# Altium PCB USB-C Charger.PcbDoc
Units mil, origin at the board's own origin, x right, y up, seen from the top; angles counter-clockwise.
Board outline 2460 x 795 mil, 2 copper layers (Top Layer, Bottom Layer); 29 components, 18 nets, 133 pads, 16 vias.
Unrouted connection lines stored in the file: 1.
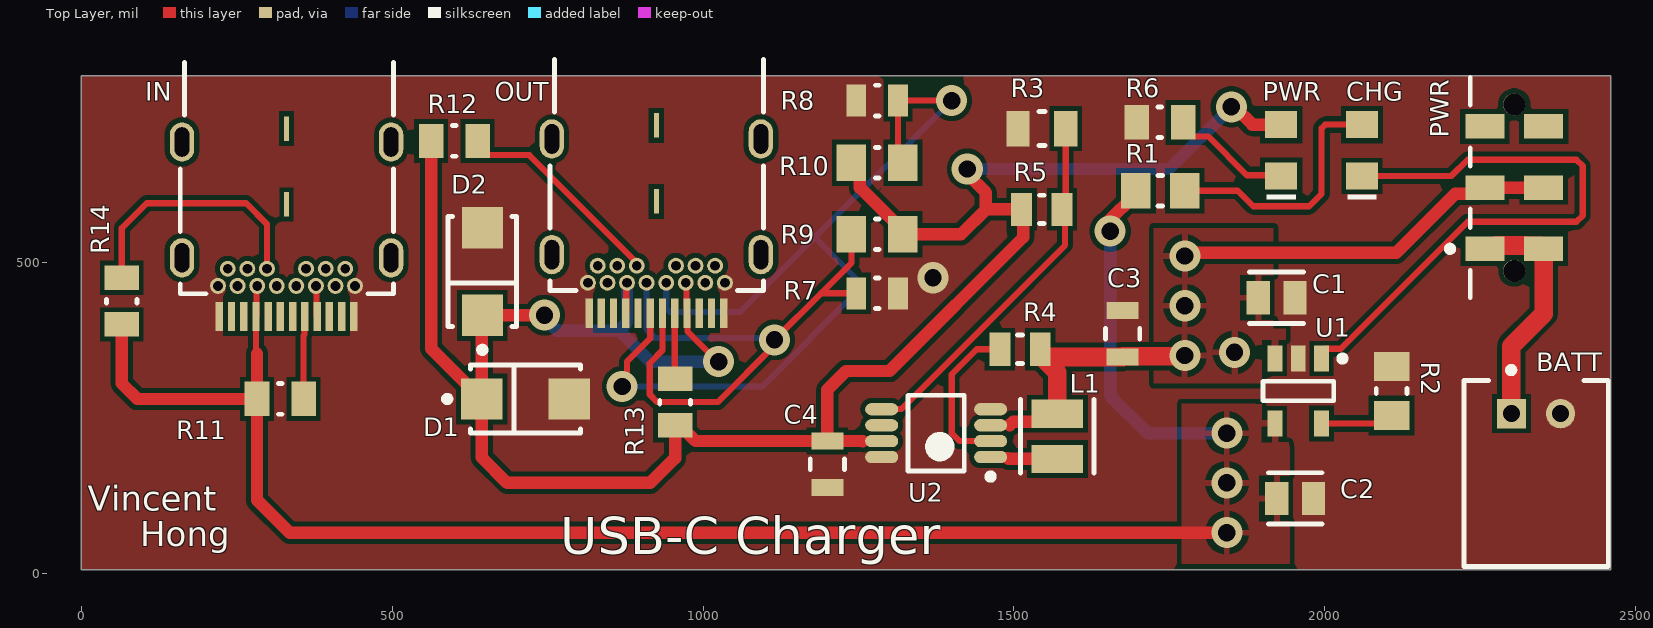
[diagram p0: Top Layer view]
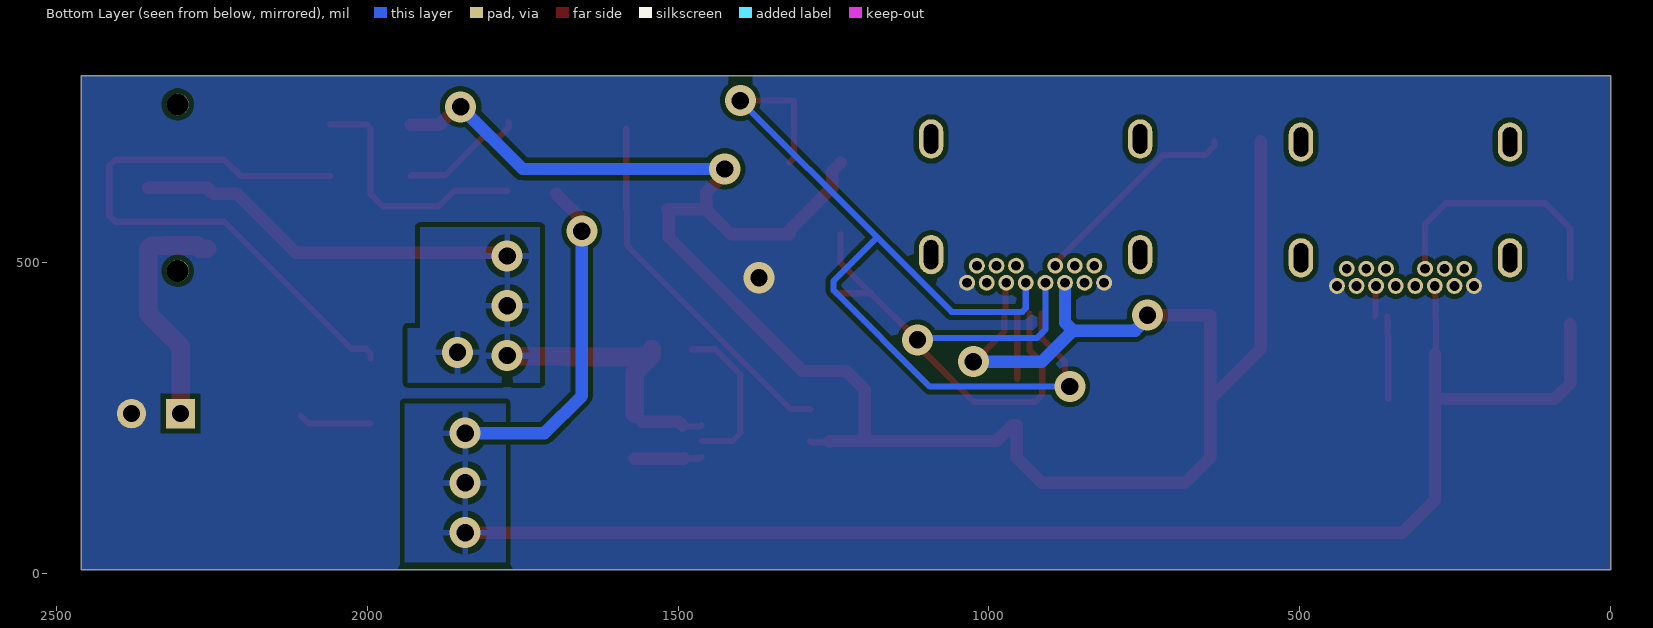
[diagram p1: Bottom Layer view, seen from below]
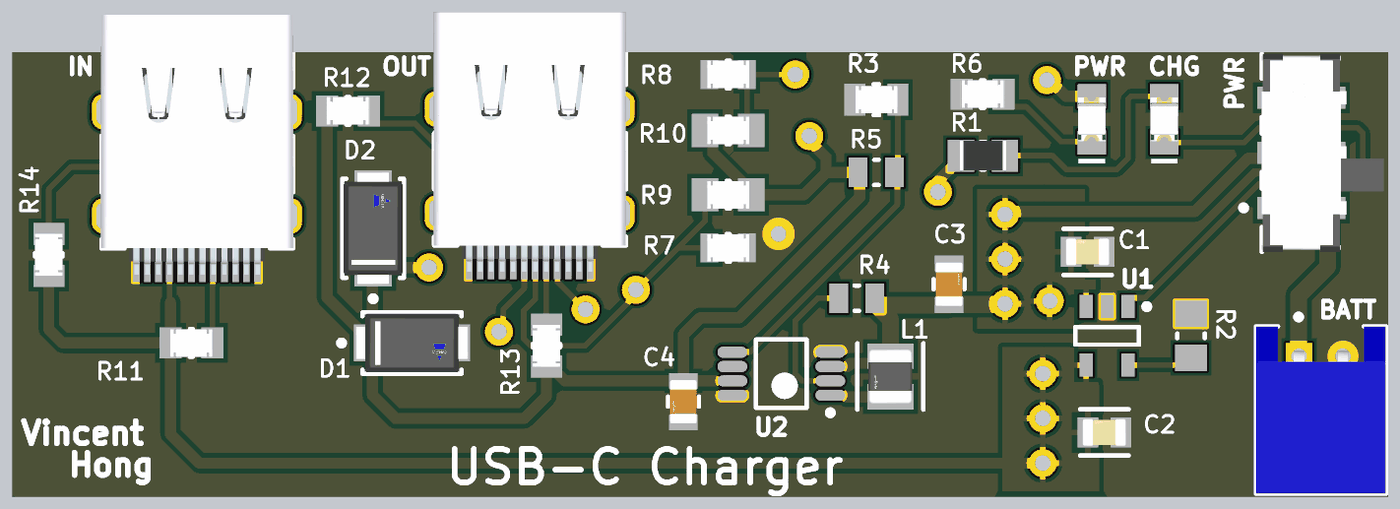
[diagram p2: 3D render of the assembled board from above, using the file's embedded part models]

## Layer stack, top to bottom
Top Solder: solder mask 0.4, Solder Resist, Dk 3.5
Top Layer: signal copper 1.4
Dielectric 1: dielectric 12.6, FR-4, Dk 4.8
Bottom Layer: signal copper 1.4
Bottom Solder: solder mask 0.4, Solder Resist, Dk 3.5

## Board outline
0,5 2460,5 2460,800 0,800

## Design rules (kind name [scope] priority, off if disabled: settings)
Clearance [All] p1: gap=8 ignorepadtopadclearanceinfootprint=TRUE
PolygonConnect [All] p1: connectstyle=Direct reliefconductorwidth=10 reliefentries=4 polygonreliefangle="90 Angle" airgapwidth=10
RoutingVias [All] p1: holewidth=28 width=50 viastyle="Through Hole" minholewidth=28 minwidth=50 maxholewidth=28 maxwidth=50
SolderMaskExpansion [All] p1: expansion=4 istentingtop=FALSE
SupplyNets "Schematic Supply Nets_1" [InNet('+5')] p1: voltage=0.000
SupplyNets "Schematic Supply Nets" [InNet('GND')] p2: voltage=0.000
Width PowerNets [InNetClass('PowerNets')] p1: maxlimit=50 minlimit=5 preferedwidth=20 bottomlayer_minwidth=20 minimp=50.000000 maximp=50.000000 favimp=50.000000
Width Width_1 [All] p2: maxlimit=10 minlimit=10 preferedwidth=10
30 further rules are at their usual default settings.

## Classes and differential pairs
net class PowerNets: 5VIN +5 NetC2_1 NetJ1_1 NetL1_2
component class "Step-up DC-DC Converter": C3 C4 D1 D2 L1 OUT PWR R3 R4 R5 R6 R7 R8 R9 R10 R12 R13 U2
component class "Charge Controller": BATT C2 CHG IN PWR R1 R2 R11 R14 U1

## Components (designator, comment, footprint, x,y, rotation, side; value= is the part's Value field where it differs from the comment)
BATT "BATT" JST-S2B-PH-K-S_V 2340,160 r0 top (schematic designator J1)
C1 "4.7uF" FP-C0805C475K8PACTU-MFG 1922.6,442.83 r0 top
C2 "4.7uF" FP-C0805C475K8PACTU-MFG 1952.6,120 r0 top
C3 "22uF" FP-GRM21B-0_15-MFG 1675,385 r90 top
C4 "22uF" FP-GRM21B-0_15-MFG 1200,175 r270 top
CHG "CHG" WL-SMCW_0805_150080xx75000 2060,680 r90 top (schematic designator LED1)
D1 "40V/1.5A" FP-95400-MFG 714.53,280 r0 top value=134pF
D2 "40V/1.5A" FP-95400-MFG 645,485 r90 top value=134pF
IN "632723100011" 632723100011 330,646.1 r180 top (schematic designator J?)
L1 "22uH" FP-LQM2HPN_G0-IPC_C 1570,220 r270 top
OUT "632723100011" 632723100011 925,651.1 r180 top (schematic designator J2)
PWR "PWR" FP-JS102011JAQN-MFG 2305,620 r90 top (schematic designator SW1)
PWR "PWR" WL-SMCW_0805_150080xx75000 1930,680 r90 top (schematic designator LED2)
R1 "1k" RESC2013X60X35ML10T20 1735.63,615 r0 top
R2 "2k" RESC2013X60X35ML10T20 2107.6,292.83 r270 top
R3 "100k" FP-CRCW0805-e3-MFG 1545,715 r0 top
R4 "750k" RESC2013X50X30LL20T20 1510,360 r0 top
R5 "750k" RESC2013X50X30LL20T20 1545,585 r180 top
R6 "4.7k" FP-CRCW0805-e3-IPC_B 1735,725 r0 top
R7 "49.9k" FP-CRCW0805-e3-IPC_C 1280,450 r180 top
R8 "49.9k" FP-CRCW0805-e3-IPC_C 1280,760 r0 top
R9 "75k" FP-CRCW0805-e3-IPC_A 1280,545 r0 top
R10 "75k" FP-CRCW0805-e3-IPC_A 1280,660 r180 top
R11 "56k" FP-CRCW0805-e3-IPC_B 320,280 r0 top
R12 "56k" FP-CRCW0805-e3-IPC_B 600,695 r0 top
R13 "56k" FP-CRCW0805-e3-IPC_B 955,275 r90 top
R14 "56k" FP-CRCW0805-e3-IPC_B 65,437.56 r90 top
U1 "MCP73831" SOT95P280X145-5N 1957.6,292.83 r270 top
U2 "PAM2401" TSOP65P490X110-8N 1375,225 r180 top

## Footprints (in the part's own frame and the unit in brackets; to place one, negate y for a bottom-side part, rotate by r counter-clockwise, add the part's x,y. Pads: shape width x height; smd on the part's side, far side on the other; paste and mask are expansions set on the pad)
632723100011 [mm] "USB 3.1 Type C Receptacle Horizontal THR"
  rect 0.3x1.2 smd: A1(-2.75,5.93) A2(-2.25,5.93) A3(-1.75,5.93) A4(-1.25,5.93) A5(-0.75,5.93) A6(-0.25,5.93) A7(0.25,5.93) A8(0.75,5.93) A9(1.25,5.93) A10(1.75,5.93) A11(2.25,5.93) A12(2.75,5.93)
  round 0.65 hole 0.4: B1(2.8,4.68) B2(2.4,3.98) B3(1.6,3.98) B4(1.2,4.68) B5(0.8,3.98) B6(0.4,4.68) B7(-0.4,4.68) B8(-0.8,3.98) B9(-1.2,4.68) B10(-1.6,3.98) B11(-2.4,3.98) B12(-2.8,4.68) Shell(-2,4.68) Shell(2,4.68)
  oval 1x1.6 hole 0.6 slot 1.2 at 90 deg: Shell(-4.27,3.53) Shell(-4.27,-1.2) Shell(4.27,3.53) Shell(4.27,-1.2)
  rect 0.2x1 smd: Shell(0,1.35) Shell(0,-1.75)
  silkscreen extent -4.37,-4.45 4.34,5, body extent -4.37,-5.6 4.37,6.19, height 3.05
FP-95400-MFG [mm]
  rect 1.7x1.68 smd paste+0 mask+0: 1(-1.79,0) 2(1.79,0)
  silkscreen extent -3.32,-1.4 2.25,1.4, body extent -2.74,-1.5 2.74,1.5, height 0.25
FP-C0805C475K8PACTU-MFG [mm]
  rect 0.95x1.35 smd paste+0 mask+0: 1(-0.75,0) 2(0.75,0)
  silkscreen extent -1.1,-1.05 1.1,1.05, body extent -1.4,-0.85 1.4,0.85, height 0.25
FP-CRCW0805-e3-IPC_A [mil]
  rect 47.5x59.38 smd paste+0 mask+0: 1(-41.37,0) 2(41.37,0)
  silkscreen extent -3,-25 3,25, body extent -85,-49 85,49, height 10
FP-CRCW0805-e3-IPC_B [mil]
  rect 39.63x55.44 smd paste+0 mask+0: 1(-37.44,0) 2(37.44,0)
  silkscreen extent -3,-25 3,25, body extent -67,-38 67,38, height 10
FP-CRCW0805-e3-IPC_C [mil]
  rect 31.75x51.5 smd paste+0 mask+0: 1(-33.5,0) 2(33.5,0)
  silkscreen extent -3,-25 3,25, body extent -53,-31 53,31, height 10
FP-CRCW0805-e3-MFG [mm]
  rect 0.95x1.45 smd paste+0 mask+0: 1(-0.975,0) 2(0.975,0)
  silkscreen extent -0.13,-0.7 0.13,0.7, body extent -1.55,-0.82 1.55,0.82, height 0.25
FP-GRM21B-0_15-MFG [mm]
  rect 0.7x1.3 smd paste+0 mask+0: 1(-0.95,0) 2(0.95,0)
  silkscreen extent -0.23,-0.7 0.23,0.7, body extent -1.4,-0.8 1.4,0.8, height 0.25
FP-JS102011JAQN-MFG [mm]
  rect 1x1.6 smd paste+0 mask+0: 1(-2.5,-1.2) 1(-2.5,1.2) 2(0,1.2) 2(0,-1.2) 3(2.5,-1.2) 3(2.5,1.2)
  round 0.9 hole 0.9 unplated paste-2539.97 mask+0: ""(-3.4,0) ""(3.4,0)
  silkscreen extent -4.5,1.8 4.5,2.75, body extent -4.6,-3.9 4.6,2.1, height 0.25
FP-LQM2HPN_G0-IPC_C [mil]
  rect 45.47x82.92 smd paste+0 mask+0: 1(-36.44,0) 2(36.44,0)
  silkscreen extent -59,-59 59,59, body extent -63,-47 63,47, height 10
JST-S2B-PH-K-S_V [mm] "THD, 2-Leads, Body 7.6x5.9mm, Pitch 2mm"
  rect 1.2x1.2 hole 0.7: 1(-1,2.45)
  round 1.2 hole 0.7: 2(1,2.45)
  silkscreen extent -2.95,-3.8 2.95,4.35, body extent -2.95,-3.8 2.95,3.8, height 4.8
RESC2013X50X30LL20T20 [mm] "Chip Resistor, 2-Leads, Body 2.00x1.25mm, IPC High Density"
  rect 0.85x1.35 smd: 1(-0.825,0) 2(0.825,0)
  silkscreen extent -0.1,-0.58 0.1,0.58, body extent -1.1,-0.72 1.1,0.72, height 0.5
RESC2013X60X35ML10T20 [mm] "Chip Resistor, 2-Leads, Body 2.1x1.35mm, IPC Low Density"
  rect 1.2x1.45 smd: 1(-1,0) 2(1,0)
  silkscreen extent -0.1,-0.63 0.1,0.63, body extent -1.05,-0.68 1.05,0.67, height 0.6
SOT95P280X145-5N [mm] "SOT23, 5-Leads, Body 2.90x2.80mm, Pitch 0.95mm, IPC Medium Density"
  rect 1.05x0.6 smd: 1(-1.325,0.95) 2(-1.325,0) 3(-1.325,-0.95) 4(1.325,-0.95) 5(1.325,0.95)
  silkscreen extent -1.45,-1.45 0.4,1.93, body extent -0.8,-1.45 0.8,1.45, height 1.45
TSOP65P490X110-8N [mm] "TSOP, 8-Leads, Body 3.00x3.00mm, Pitch 0.65mm, IPC Medium Density"
  oval 1.35x0.5 smd: 1(-2.225,0.975) 2(-2.225,0.325) 3(-2.225,-0.325) 4(-2.225,-0.975) 5(2.225,-0.975) 6(2.225,-0.325) 7(2.225,0.325) 8(2.225,0.975)
  silkscreen extent -2.35,-1.55 1.15,1.9, body extent -1.55,-1.55 1.55,1.55, height 1.1
WL-SMCW_0805_150080xx75000 [mm] "SMD Mono-color Chip LED, body 2.0x1.25mm"
  rect 1.1x1.3 smd: 1(-1.05,0) 2(1.05,0)
  silkscreen extent -2,-0.6 -1.8,0.6, body extent -1,-0.63 1,0.62, height 0.7

## Part data
BATT: library part CMP-1755-00004-1, "Male Header, Pitch 2 mm, 1 x 2 Position, Height 4.8 mm, Tail Length 3.4 mm, -25 to 85 degC, RoHS, Bulk", Capacitance="10 uF", Case\Package=Radial, Max Operating Temperature="85 degC", Min Operating Temperature="-40 degC", Package Quantity=200, Tolerance=20%, Voltage Rating="50 V", ComponentLink1Description=Datasheet, ComponentLink1URL=http://www.jst-mfg.com/product/pdf/eng/ePH.pdf, DatasheetVersion=Dec-12, Diameter="5 mm", Height="11 mm", Lead Pitch="2 mm", Length="11 mm", Mount="Through Hole", PackageDescription="Male Header, Pitch 2 mm, 1 x 2 Position, Height 4.8 mm, Tail Length 3.4 mm", PackageReference=S2B-PH-K-S, Packaging=Bulk, Pins=2, Radiation Hardening=No, REACH SVHC="No SVHC", RoHSCompliant=true, Voltage Rating (DC)="50 V"
C1 C2: library part CMP-2007-01007-2, "CAP CER 4.7UF 10V X5R 0805", Case Code (Imperial)=0805, Case Code (Metric)=2012, Dielectric=X5R, Dielectric Material=Ceramic, Max Operating Temperature=85°C, Min Operating Temperature=-55°C, Package Quantity=1, Tolerance=10%, Voltage=10V, Capacitance=4.7uF, Case/Package=0805, Construction=Flat, Depth=1.25mm, Dissipation Factor=5%, Height=1.25mm, Lead Free="Lead Free", Lead Pitch=0.75mm, Length=2mm, Mount="Surface Mount", Number of Pins=2, Packaging="Tape and Reel", Radiation Hardening=No, REACH SVHC="No SVHC", RoHS Compliant=Yes, Series=C, Termination=SMD/SMT, Thickness=0.055inch, Voltage Rating=10V, Voltage Rating (DC)=10V, Width=1.2mm
C3 C4: library part CMP-2007-03385-2, "Chip Multilayer Ceramic Capacitors for General Purpose, 0805, 22uF, X5R, 15%, 20%, 6.3V", Case Code (Imperial)=0805, Case Code (Metric)=2012, Dielectric=X5R, Max Operating Temperature=85°C, Min Operating Temperature=-55°C, Package Quantity=1, Tolerance=20%, Voltage=6.3V, Capacitance=22uF, Case/Package=0805, Depth=1.25mm, Height=1.25mm, Lead Free="Lead Free", Length=2mm, Material=Ceramic, Mount="Surface Mount", Packaging="Tape and Reel", Radiation Hardening=No, REACH SVHC="No SVHC", Termination=SMD/SMT, Thickness=0.053inch, Voltage Rating=6.3V, Voltage Rating (DC)=6.3V, Width=0.049inch
CHG: library part CMP-1426-00011-3, "LED Uni-Color Red 630nm 2-Pin Chip 0805(2012Metric) T/R", Case Code (Imperial)=0805, Case Code (Metric)=2012, Color=Red, Forward Current=100mA, Forward Voltage=2V, Max Junction Temperature (Tj)=95°C, Max Operating Temperature=85°C, Max Reverse Voltage (DC)=5V, Min Operating Temperature=-40°C, Power Dissipation=72mW, Test Current=20mA, Case/Package=0805, Dominant Wavelength=625nm, Height=700µm, Length=2mm, Lens Style="Clear, Rectangular", Luminous Intensity=150mcd, Mount="Surface Mount", Packaging="Tape and Reel", Peak Wavelength=630nm, REACH SVHC=Unknown, RoHS=Compliant, Viewing Angle=140°, Wavelength=625nm, Width=1.25mm
D1 D2: library part CMP-02539-000025-1, "DIODE SCHOTTKY 40V 1.5A SMA", Capacitance=134pF, Forward Current=1.5A, Manufacturer=Vishay, Manufacturer Part Number=VS-15MQ040NTRPBF, Max Junction Temp=+150°C, Max Repetitive Reverse Voltage=40V, Max Surge Forward Current=140A, Package=95400, Peak Reverse Current=0.5mA, Temperature="-40°C to +150°C", Temperature Range Low=-40°C, Automotive=No, Category=Diode, ComponentLink2Description=Datasheet, ComponentLink2URL=http://www.vishay.com/docs/94141/vs-15mq040ntrpbf.pdf, Device Class L1="Discrete Semiconductors", Device Class L2=Diodes, Device Class L3="Schottky Diodes", Digikey Description="DIODE SCHOTTKY 40V 1.5A SMA", Footprint Url=http://www.vishay.com/docs/95400/sma.pdf, Height=2.29mm, Lead Free=Yes, Mouser Description="Schottky Diodes & Rectifiers 2.1 Amp 40 Volt", Octopart=https://octopart.com/vs-15mq040ntrpbf-vishay-44340959, Reverse Voltage=40V, RoHS=TRUE, Standoff Height=0mm, Temperature Range High=+150°C
IN OUT: library part CMP-1502-03213-3, Contact Resistance=30mΩ, Current Rating=5A, Insulation Resistance=1GΩ, Max Operating Temperature=105°C, Min Operating Temperature=-40°C, Voltage Rating=20V, Connector Type=USB, Contact Material="Gold, Nickel", Gender=Receptacle, Height=3.16mm, Mount="Surface Mount, Through Hole", NexarPartId=68112674, Number of Contacts=24, Number of Pins=24, Orientation=Horizontal, Packaging="Tape and Reel", Pin Length=1.5mm, RoHS=Compliant, USB Standard="USB 3.1"
L1: library part CMP-06042-017002-1, "Multilayer Type Inductor for Power Lines, 1008 (2520), 2.2μH, 20%, 0.225Ω, 1100mA", Case/Package=1008, Current Rating=1.1A, DC Resistance (DCR)=225mR, Inductance=2.2uH, Max Operating Temperature=85°C, Min Operating Temperature=-40°C, Package Quantity=3000, Self Resonant Frequency=40MHz, Test Frequency=1MHz, Tolerance=20%, Height - Seated (Max)=0.039inch, Length=0.098inch, Mount="Surface Mount", Packaging="Tape and Reel", RoHS Compliant=Yes, Shielding=Shielded, Width=0.079inch
PWR: library part CMP-10038-000001-1, "SWITCH SLIDE SPDT 300MA 6V", Contact Current Rating=300mA, Contact Resistance=70mΩ, Manufacturer=C&K, Manufacturer Part Number=JS102011JAQN, Temperature="-40°C to +85°C", Temperature Range High=+85°C, Temperature Range Low=-40°C, Voltage Rating Dc=6V, Automotive=No, Category=Switch, ComponentLink2Description=Datasheet, ComponentLink2URL=https://www.ckswitches.com/media/1422/js.pdf, Device Class L1=Electromechanical, Device Class L2=Switches, Device Class L3="Slide Switches", Digikey Description="SWITCH SLIDE SPDT 300MA 6V", Electromechanical Life=5000Cycles, Height=3.5mm, Lead Free=Yes, Mount="Surface Mount", Mouser Description="JS Series Sub-Miniature Slide Switch SPDT Right-Angle SMT", Octopart=https://octopart.com/js102011jaqn-c%26k+components-74831566, Package=JS102011JAQN, RoHS=TRUE, Throw Configuration=SPDT
PWR: library part CMP-1426-00008-7, "Led, Blue, 470 Nm, 3.2 V, 30 Ma, 145 Mcd Rohs Compliant: Yes", Case Code (Imperial)=0805, Case Code (Metric)=2012, Color=Blue, Forward Current=100mA, Forward Voltage=3.2V, Max Junction Temperature (Tj)=95°C, Max Operating Temperature=85°C, Max Reverse Voltage (DC)=5V, Min Operating Temperature=-40°C, Power Dissipation=105mW, Test Current=20mA, Case/Package=0805, Dominant Wavelength=470nm, Height=700µm, Lead Free="Lead Free", Length=2mm, Lens Style="Clear, Rectangular", Luminous Intensity=145mcd, Mount="Surface Mount", Packaging="Tape and Reel", Peak Wavelength=465nm, REACH SVHC=Unknown, Reverse Voltage=5V, RoHS=Compliant, Viewing Angle=140°, Wavelength=470nm, Width=1.25mm
R1: library part CMP-2100-03671-1, "Chip Resistor, 1 KOhm, +/- 1%, 125 mW, -55 to 155 degC, 0805 (2012 Metric), RoHS, Tape and Reel", Case Code (Imperial)=0805, Case Code (Metric)=2012, Manufacturer=Yageo, Max Operating Temperature=155degC, Max Power Dissipation=125mW, Min Operating Temperature=-55degC, Package Description="2-Pin Surface Mounted Device, Body 2 x 1.25 mm", Package Quantity=1, Resistance=1KOhm, Temperature Coefficient=100ppm/degreesC, Tolerance=1%, Voltage Rating=150V, Case/Package=0805, Composition=ThickFilm, Datasheet URL=http://www.yageo.com/NewPortal/yageodocoutput?fileName=/pdf/R-Chip/PYu-RC_Group_51_RoHS_L_5.pdf, Datasheet Version="Rev. 5, 10/2016", Depth=1.25mm, Height=0.024inch, Lead Free=LeadFree, Length=0.079inch, Manufacturer URL=http://www.yageo.com/, Military Standard=Not, Number of Pins=2, Number of Terminations=2, Package Reference=0805, Packaging=TapeandReel, Power Rating=125mW, REACH SVHC=Unknown, RoHSCompliant=true, Termination=SMD/SMT, Voltage Rating (DC)=150V, Width=0.049inch
R2: library part CMP-2001-01361-1, Manufacturer=Yageo, Part Number=RC0805JR-072KL
R3: library part CMP-2001-04899-2, "RES Thick Film, 100kΩ, 1%, 0.125W, 100ppm/°C, 0805", Case Code (Imperial)=0805, Case Code (Metric)=2012, Max Operating Temperature=155°C, Min Operating Temperature=-55°C, Package Quantity=5000, Power Rating=125mW, Resistance=100kR, Temperature Coefficient=100ppm/°C, Tolerance=1%, Voltage Rating=150V, Case/Package=0805, Composition="Thick Film", Contact Plating=Tin, Depth=1.25mm, Height=0.45mm, Lead Free="Lead Free", Length=2mm, Military Standard=Not, Mount="Surface Mount", Number of Pins=2, Packaging="Tape and Reel", Radiation Hardening=No, Termination=SMD/SMT, Voltage Rating (DC)=150V, Weight=0.000194oz, Width=1.25mm
R4 R5: library part CMP-2001-04102-1, Manufacturer="Vishay Dale", Part Number=CRCW0805750KFKEA
R6: library part CMP-2100-03615-2, "RES Thick Film, 4.7kΩ, 1%, 0.125W, 100ppm/°C, 0805", Case Code (Imperial)=0805, Case Code (Metric)=2012, Max Operating Temperature=155°C, Max Power Dissipation=125mW, Min Operating Temperature=-55°C, Package Quantity=10, Resistance=4.7kR, Temperature Coefficient=100ppm/°C, Tolerance=1%, Voltage Rating=150V, Case/Package=0805, Composition="Thick Film", Contact Plating=Tin, Depth=1.25mm, Features="Automotive AEC-Q200", Height=0.45mm, Lead Free="Lead Free", Length=2mm, Military Standard=Not, Number of Terminations=2, Packaging="Tape and Reel", Power Rating=125mW, Radiation Hardening=No, Termination=SMD/SMT, Voltage Rating (DC)=150V, Weight=0.000194oz, Width=1.25mm
R7 R8: library part CMP-2001-03952-2, "RES Thick Film, 49.9kΩ, 1%, 0.125W, 100ppm/°C, 0805", Case Code (Imperial)=0805, Case Code (Metric)=2012, Max Operating Temperature=155°C, Max Power Dissipation=125mW, Min Operating Temperature=-55°C, Package Quantity=10, Resistance=49.9kR, Temperature Coefficient=100ppm/°C, Tolerance=1%, Voltage Rating=150V, Case/Package=0805, Composition="Thick Film", Contact Plating=Tin, Depth=1.25mm, Features="Automotive AEC-Q200", Height=0.45mm, Lead Free="Lead Free", Length=2mm, Military Standard=Not, Mount="Surface Mount", Number of Terminations=2, Packaging="Tape and Reel", Power Rating=125mW, Radiation Hardening=No, Termination=SMD/SMT, Voltage Rating (DC)=150V, Weight=0.000194oz, Width=0.049inch
R9 R10: library part CMP-2001-04106-2, "RES Thick Film, 75kΩ, 1%, 0.125W, 100ppm/°C, 0805", Case Code (Imperial)=0805, Case Code (Metric)=2012, Max Operating Temperature=155°C, Max Power Dissipation=125mW, Min Operating Temperature=-55°C, Package Quantity=10, Resistance=75kR, Resistance Tolerance=1%, Resistor Type="Thick Film", Temperature Coefficient=100ppm/°C, Voltage Rating=150V, Case/Package=0805, Construction=Rectangular, Contact Plating=Tin, Depth=1.25mm, Features="Automotive AEC-Q200", Height=0.45mm, Lead Free="Lead Free", Length=2mm, Military Standard=Not, Mount="Surface Mount", Number of Pins=2, Number of Terminations=2, Packaging="Tape and Reel", Power Rating=125mW, Radiation Hardening=No, RoHS Compliant=Yes, Series=CRCW, Technology="THICK FILM", Termination=SMD/SMT, Tolerance=1%, Voltage Rating (DC)=150V, Weight=0.000194oz, Width=0.049inch, Working Voltage=150V
R11 R12 R13 R14: library part CMP-2001-04015-2, "RES Thick Film, 56kΩ, 1%, 0.125W, 100ppm/°C, 0805", Case Code (Imperial)=0805, Case Code (Metric)=2012, Max Operating Temperature=155°C, Max Power Dissipation=125mW, Min Operating Temperature=-55°C, Package Quantity=10, Resistance=56kR, Temperature Coefficient=100ppm/°C, Tolerance=1%, Voltage Rating=150V, Case/Package=0805, Composition="Thick Film", Contact Plating=Tin, Depth=1.25mm, Features="Automotive AEC-Q200", Height=0.45mm, Lead Free="Lead Free", Length=2mm, Military Standard=Not, Mount="Surface Mount", Number of Pins=2, Number of Terminations=2, Packaging="Tape and Reel", Power Rating=125mW, Radiation Hardening=No, Termination=SMD/SMT, Voltage Rating (DC)=150V, Weight=0.000194oz, Width=1.25mm
U1: "Power Supply Support Circuit, Adjustable, 1 Channel, PDSO5", Case/Package=LSSOP, Manufacturer=Microchip, Manufacturer Part Number=MCP73831T-2ACI/OT, Max Operating Temperature=85°C, Max Supply Voltage=6V, Min Operating Temperature=-40°C, Min Supply Voltage=3.75V, Nominal Supply Voltage=5.2V, Package Body Material=Plastic, Package Equivalence Code=TSOP5/6,.11,37, Package Shape=Rectangular, Package Style="SMALL OUTLINE, LOW PROFILE, SHRINK PITCHMeter", Peak Reflow Temperature (Cel)=260°C, Power Supplies=3.3/5V, Supply Current-Max (Isup)=1.5mA, Temperature Grade=INDUSTRIAL, Time @ Peak Reflow Temperature-Max (s)=40s, Adjustable Threshold=Yes, Category="Battery Management", Channels=1, ComponentLink1Description=https://datasheet.ciiva.com:443/pdfs/VipMasterIC/IC/MCHP/MCHPS05673/MCHPS05673-1.pdf?src-supplier=IHS+Markit, ComponentLink1URL=https://datasheet.ciiva.com:443/pdfs/VipMasterIC/IC/MCHP/MCHPS05673/MCHPS05673-1.pdf?src-supplier=IHS+Markit, Height - Seated (Max)=1.45mm, JESD-30 Code=R-PDSO-G5, JESD-609 Code=e3, Length=2.95mm, Moisture Sensitivity Level=1, Number of Channels=1, Pins=5, Pricing="3000=0.5836 (USD)", Qualification Status="Not Qualified", Reach SVHC Compliant=Yes, RoHS=Yes, RoHS Compliant=Yes, Stock=6000, Supplier="Arrow Electronics", Supplier Part Number=MCP73831T-2ACI/OT, Surface Mount=Yes, Terminal Finish=Tin, Terminal Form="Gull Wing", Terminal Pitch=0.95mm, Terminal Position=DUAL, Throw Configuration="POWER SUPPLY SUPPORT CIRCUIT", Width=1.65mm
U2: "1.0MHz STEP-UP DC-DC CONVERTER"

## Via types
v1: diameter 50, hole 28, Top Layer to Bottom Layer, 16 vias

## Nets (pads, with @x,y where several pads share a name; then routed paths per layer and width w, separated by ;. In a path a pad name is that pad's centre, name@x,y a point inside that pad or via, vN(x,y) a via of type N, cw(c..) or ccw(c..) an arc to the next point about the centre after c; other vN are vias at no path point)
5VIN: C2.1 IN.A4 IN.A9 IN.B4 IN.B9 R1.1 R11.1 R14.1 U1.4 | length 2859.4
  Top Layer w10: 280.79,354.21 IN.A9 281.57,413.42 281.57,460.66 IN.B4 ; IN.B9 378.43,460.66 378.43,413.42 IN.A4 ; v1@1650,563.82 1650,555 v1(1655,550) ; R1.1@1696.26,610.08 R1.1
  Top Layer w20: R14.1 65,305 90,280 R11.1 ; 282.56,117.44 335,65 v1(1842.6,65) ; 282.56,120 R11.1 ; 282.56,352.44 R11.1 ; v1@1650,563.82 R1.1@1696.26,610.08
  Bottom Layer w20: v1(1655,550) 1655,285 1715,225 v1(1842.6,225)
  other v1: 1842.6,145
+5: C4.1 D1.1 D2.1 OUT.A4 OUT.A9 OUT.B4 OUT.B9 PWR.2@1930,721.34 R5.2 R9.2 R10.2 R12.1 R13.1 U2.7 | length 3660.7
  Top Layer w10: D2.1 D2.1@645.47,415 ; OUT.A9 876.57,418.42 876.57,465.66 OUT.B4 ; OUT.B9 973.43,465.66 973.43,418.42 OUT.A4 974.99,416.86 974.99,388.63 1023.62,340 v1(1025,340) ; 1256.88,212.21 1255,210.32 1255,210 1255.35,210.35 1285.55,210.35 U2.7
  Top Layer w20: R12.1 562.56,361.1 D1.1@643.66,280 ; D2.1@644.06,413.58 D1.1 644.06,185.94 685,145 915,145 955,185 R13.1 962.91,237.56 988.07,212.4 C4.1 ; D2.1@645.47,415 v1(745,415) ; R10.2 1252.38,646.25 1252.38,619.93 1321.37,550.94 R9.2 1415,545 1455,585 ; 1256.88,212.21 1256.69,212.4 C4.1 ; v1(1425,650) 1425,641.88 1455,611.88 1455,585 ; v1(1850,750) 1855,750 1883.66,721.34 PWR.2@1930,721.34 ; C4.1 1200,295 1230,325 1300,325 1515.14,540.14 1515.14,582.62 1517.52,585 1455,585
  Bottom Layer w20: v1(745,415) 745,410 765,390 865,390 ; OUT.B4 877.76,402.76 865,390 ; v1(1025,340) 915,340 865,390 ; v1(1425,650) 1750,650 v1(1850,750)
"CC1 IN": IN.A5 R11.2 | length 133.5
  Top Layer w10: R11.2 357.44,382.32 358.75,383.63 358.75,411.86 IN.A5
"CC1 OUT": OUT.A5 R13.2 | length 105.4
  Top Layer w10: OUT.A5 954.53,312.91 R13.2
"CC2 IN": IN.B5 R14.2 | length 416
  Top Layer w10: R14.2 65,555 105,595 265,595 298.5,561.5 IN.B5
"CC2 OUT": OUT.B5 R12.2 | length 346.7
  Top Layer w10: R12.2 637.44,687.09 652.25,672.28 720.62,672.28 890.52,502.38 890.52,497.39 OUT.B5
D+: OUT.A6 OUT.B6 R7.2 R9.1 | length 956.8
  Top Layer w10: OUT.A6 934.84,358.2 914.28,337.63 914.28,287.24 926.52,275 1023.74,275 1115,366.26 v1(1115,375) 1190,450 ; R9.1 1238.63,498.63 1190,450 ; R7.2 1190,450
  Bottom Layer w10: OUT.B6 909.25,391.61 922.86,378 1112,378 v1(1115,375)
D-: OUT.A7 OUT.B7 R8.2 R10.1 | length 1527.8
  Top Layer w10: v1(870,300) 877.65,307.65 877.65,339.99 915.16,377.5 OUT.A7 ; R10.1 1313.5,667.87 R8.2 v1(1400,760)
  Bottom Layer w10: v1(870,300) 1095,300 1250,455 1250,470 1180,540 ; OUT.B7 940.75,425.86 946.61,420 1060,420 1180,540 ; v1(1400,760) 1180,540
GND: BATT.2 C1.2 C2.2 C3.2 C4.2 D1.2 D2.2 IN.A1 IN.A12 IN.B1 IN.B12 OUT.A1 OUT.A12 OUT.B1 OUT.B12 R2.1 R3.1 R6.1 R7.1 R8.1 U1.2 U2.4 U2.8
  other v1: 1370,475
NetC2_1: C1.1 C3.1 L1.1 PWR.2@2257.76,620 PWR.2@2352.24,620 R4.2 U1.3 U2.3 | length 1094.4
  Top Layer w10: U2.3 1464.45,235.94 1489.47,235.94 1490.37,235.05 1493.12,237.8
  Top Layer w20: 1493.12,237.8 1499.03,243.71 1557.27,243.71 L1.1 ; v1(1775,510) 1780,515 2115,515 2210.31,610.31 2248.07,610.31 2257.76,620 PWR.2@2352.24,620
  Top Layer w30: R4.2 1542.48,350.16 R4.2@1544.21,348.43 ; L1.1 1570,322.64 R4.2@1544.21,348.43 ; v1@1777.5,352.5 v1(1775,350) 1773.8,348.8 1676.2,348.8 C3.1 1554.88,347.6 1554.06,348.43 R4.2@1544.21,348.43 ; v1@1852.5,352.5 v1(1855,355)
  other v1: 1775,430
NetJ1_1: BATT.1 PWR.1@2257.76,521.57 PWR.1@2352.24,521.57 | length 385.9
  Top Layer w20: BATT.1@2300,257.09 BATT.1
  Top Layer w30: PWR.1@2257.76,521.57 2269.57,521.57 2274.85,526.86 2321.87,526.86 2322.46,526.26 2347.56,526.26 2352.24,521.57 2352.24,417.24 2300,365 BATT.1@2300,257.09
NetL1_2: L1.2 U2.1 | length 110.7
  Top Layer w10: U2.1 1464.45,184.76 1490.24,184.76 1491.44,183.56
  Top Layer w20: 1490,185 1491.44,183.56 L1.2
NetLED1_1: CHG.1 U1.1 | length 970.5
  Top Layer w10: U1.1 1995,353.86 2001.81,360.67 2025.67,360.67 2230,565 2405,565 2415,575 2415,655 2405,665 2230,665 2203.66,638.66 CHG.1
NetLED1_2: CHG.2 R1.2 | length 411.5
  Top Layer w10: R1.2 1860,615 1885,590 1975,590 1995,610 1995,715.48 2000.86,721.34 CHG.2
NetLED2_1: PWR.1@1930,638.66 R6.2 | length 198
  Top Layer w10: R6.2 1772.44,717.09 1787.25,702.28 1812.72,702.28 1875,640 1928.66,640 PWR.1@1930,638.66
NetR2_2: R2.2 U1.5 | length 117.9
  Top Layer w10: U1.5 2094.8,240.67 R2.2
NetR3_2: R3.2 R5.1 U2.5 | length 592.4
  Top Layer w10: U2.5 1287.84,263.83 1318.83,263.83 1582.48,527.48 1582.48,585 1583.39,585.91 R3.2
NetR4_1: R4.1 U2.2 | length 256.7
  Top Layer w10: U2.2 1412.8,212.2 1400,225 1400,319.54 1440.46,360 R4.1
pads on no net: IN.A2 IN.A3 IN.A6 IN.A7 IN.A8 IN.A10 IN.A11 IN.B2 IN.B3 IN.B6 IN.B7 IN.B8 IN.B10 IN.B11 IN.Shell OUT.A2 OUT.A3 OUT.A8 OUT.A10 OUT.A11 OUT.B2 OUT.B3 OUT.B8 OUT.B10 OUT.B11 OUT.Shell PWR. PWR.3 U2.6

## Polygon pours and split planes (outlines as drawn)
GND on Top Layer "GND_L01_P012" (solid, pour order 12): 0,800 2460,800 2460,5 5,5 0,0
NetC2_1 on Top Layer "NETC2_1_L01_P006" (solid, pour order 6): 1917.6,555 1917.6,392.83 1937.6,392.83 1937.6,305 1725,305 1725,555
5VIN on Top Layer "5VIN_L01_P003" (solid, pour order 3): 1943.6,15.07 1770.39,15.07 1770.39,272.48 1943.6,272.48
GND on Bottom Layer "GND_L02_P011" (solid, pour order 11): 0,800 0,5 2460,5 2460,800
NetC2_1 on Bottom Layer "NETC2_1_L02_P007" (solid, pour order 7): 1915,556.08 1915,393.92 1935,393.92 1935,306.08 1722.4,306.08 1722.4,556.08
5VIN on Bottom Layer "5VIN_L02_P009" (solid, pour order 9): 1940,272.67 1940,17.33 1777.4,17.33 1777.4,272.67

## Silkscreen, mask and mechanical layers (free items; w line width, h text height)
Top Overlay:
  text "Vincent" at 10,100 h40
  text "Hong" at 95,43.33 h40
  text "USB-C Charger" at 770,29.99 h60

## Text inside footprints (layer, text, board x,y; h text height)
IN: Mechanical 2 "PCB Edge" at 396.93,866.57 h24 r180
OUT: Mechanical 2 "PCB Edge" at 991.93,871.57 h24 r180